# Altium PCB PCB_Testplatine - GND mit Tracks.PcbDoc (part 4 of 4)
Units mm, origin at the board's own origin, x right, y up, seen from the top; angles counter-clockwise.
Board outline 124.77 x 137.35 mm, 2 copper layers (Top Layer, Bottom Layer); 214 components, 181 nets, 1100 pads, 464 vias.
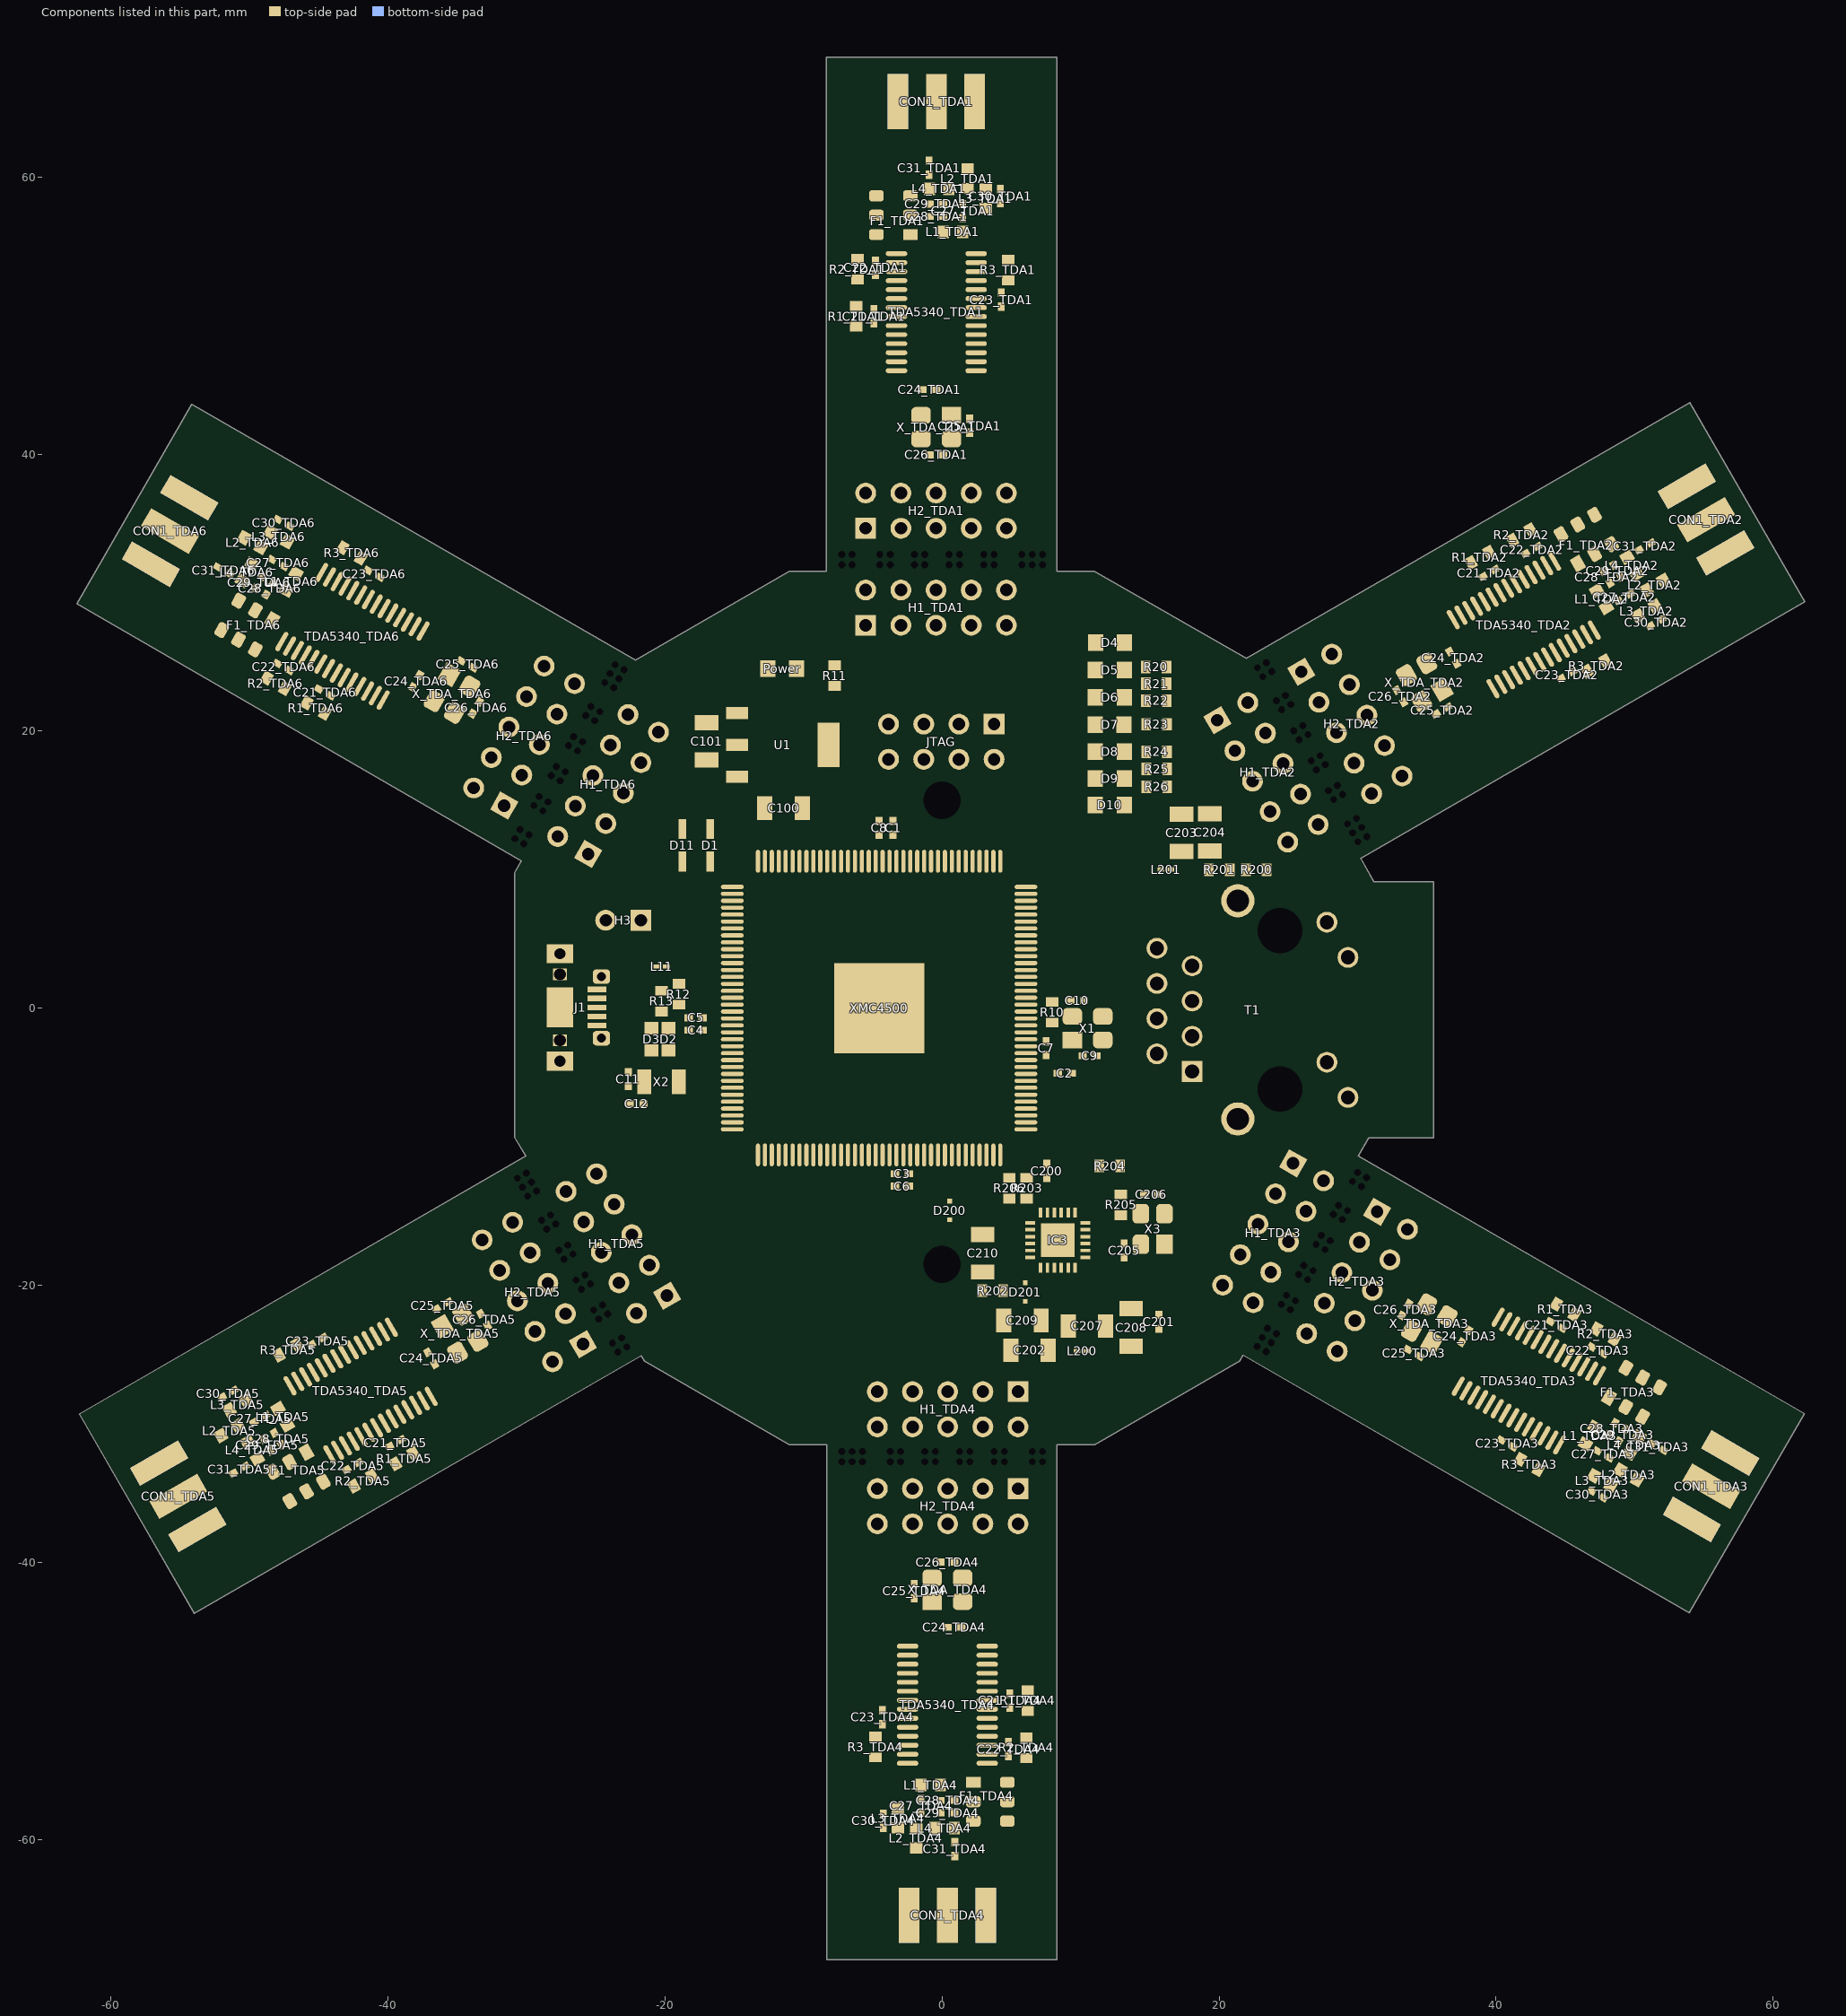
[diagram p4: the components of this part, seen from the top]

## Polygon pours and split planes (outlines as drawn) (continued)
GND on Bottom Layer "Bottom Layer- GND" (solid, pour order 43): -35.803,14.379 -28.053,27.803 -54.034,42.803 -61.784,29.379
"VDD (3,3V)" on Bottom Layer "VDD_(3,3V)_L02_P056" (solid, pour order 56): -19.16,13.25 -1.71,13.25 -1.71,31.29 -10.99,31.29 -19.16,26.56
GND on Bottom Layer "GND_L02_P064" (solid, pour order 64): -21.72,25.11 -19.16,26.56 -19.16,13.25 -1.71,13.25 -1.71,31.29 10.97,31.3 21.72,25.11 31.08,8.91 35.27,8.91 35.27,-9.16 30.67,-9.16 21.35,-25.32 10.96,-31.31 -10.97,-31.3 -21.35,-25.31 -30.62,-9.26 -30.63,9.69

## Other copper
Top Layer:
  text "TOP" at 10.72,-30.9 h1.52 r30
Bottom Layer:
  text "BOT" at 14.24,-28.87 h1.52 r30

## Silkscreen, mask and mechanical layers (free items; w line width, h text height)
Top Overlay:
  text "TDA1" at 6.78,39.14 h1.52 r90
  text "TDA6" at -29.369,27.523 h1.52 r150
  text "TDA2" at 35.98,15.877 h1.52 r30
  text "TDA5" at -35.979,-15.858 h1.52 r210
  text "v1.0" at -19.85,-25.4 h1.52 r330
  text "TDA3" at 29.149,-27.603 h1.52 r330
  text "TDA4" at -6.82,-39.19 h1.52 r270
Mechanical 4:
  circle w0.2: c0,15 r1.5
  circle w0.2: c0,-18.5 r1.5
  lines w0.2: -30.728,9.701 -21.789,25.183 -11,31.4 11,31.4 21.789,25.183 31.127,9.01 35.38,9.01 35.38,-9.266 30.727,-9.266 21.423,-25.38 ; -30.727,9.7 -30.727,-9.266 -21.423,-25.38 -11,-31.4 11,-31.4 21.423,-25.38 ; -27.26,-4.75 -27.26,4.75 ; -22.5,-13 -20.75,-11.75 ; -22.5,13 -20.75,11.75 ; -17.11,22.338 -17.11,-22.3 17.14,-22.3 17.14,22.29 ; 0,-24.75 0,-26 ; 0,24.25 0,26 ; 21,-12.25 22.5,-13 ; 21.25,12.25 22.5,13 ; 0,-26 15,-26 30,0 15,26 -15,26 -30,0 -15,-26 0,-26
Mechanical 16:
  drawing of 1870 lines, arcs and shapes, not listed
  text "1" at -104.254,85.611 h1.78
  text "2" at -31.61,85.611 h1.78
  text "3" at 41.542,85.611 h1.78
  text "4" at 114.44,85.611 h1.78
  text "A" at -138.595,62.599 h1.78
  text "A" at 148.425,62.599 h1.78
  text "B" at -138.595,14.542 h1.78
  text "C" at -138.595,-33.972 h1.78
  text "ENGINEER:" at 33.49,-70.98 h1.14
  text "TITLE:" at 71.59,-70.98 h1.14
  text "Christof Pfannenmueller" at 34.38,-73.93 h1.52
  text "PCB DESIGNER:" at 33.49,-78.473 h1.14
  text "D" at -138.595,-81.978 h1.78
  text "D" at 148.425,-81.978 h1.78
  text "DATE:" at 33.49,-86.22 h1.14
  text "PART NO.:" at 71.59,-86.22 h1.14
  text "REV:" at 124.93,-86.22 h1.14
  text "Altium Limited" at 0.47,-88.76 h1.78
  text ".PRINT_DATE" at 34.76,-89.268 h1.78
  text "12a Rodborough Rd" at 0.47,-91.3 h1.78
  text "Frenchs Forest" at 0.47,-93.84 h1.78
  text "FILE NAME:" at 33.49,-93.84 h1.14
  text "DWG NO:" at 71.59,-93.84 h1.14
  text "SCALE:" at 124.93,-93.84 h1.14
  text "NSW 2086" at 0.47,-96.38 h1.78
  text ".PCB_FILE_NAME_NO_PATH" at 34.76,-96.888 h1.78
  text "1" at -104.254,-102.349 h1.78
  text "2" at -31.61,-102.349 h1.78
  text "3" at 41.542,-102.349 h1.78
  text "4" at 114.44,-102.349 h1.78

## Text inside footprints (layer, text, board x,y; h text height)
H1_TDA1: Top Overlay "2" at -8.06,29.672 h1.27; Top Overlay "1" at -7.552,27.132 h1.27; Top Overlay "9" at 6.164,27.132 h1.27; Top Overlay "10" at 6.164,29.672 h1.27
H1_TDA2: Top Overlay "10" at 27.472,11.676 h1.27 r300; Top Overlay "9" at 25.272,10.406 h1.27 r300; Top Overlay "1" at 19.25,22.8 h1.27 r300; Top Overlay "2" at 20.7,24.1 h1.27 r300
H1_TDA3: Top Overlay "10" at 21.258,-22.336 h1.27 r240; Top Overlay "9" at 19.058,-21.066 h1.27 r240; Top Overlay "1" at 25.916,-9.187 h1.27 r240; Top Overlay "2" at 28.37,-10.017 h1.27 r240
H1_TDA4: Top Overlay "10" at -6.204,-29.722 h1.27 r180; Top Overlay "9" at -6.204,-27.182 h1.27 r180; Top Overlay "1" at 7.512,-27.182 h1.27 r180; Top Overlay "2" at 8.02,-29.722 h1.27 r180
H1_TDA5: Top Overlay "10" at -27.472,-11.657 h1.27 r120; Top Overlay "9" at -25.272,-10.387 h1.27 r120; Top Overlay "1" at -18.414,-22.266 h1.27 r120; Top Overlay "2" at -20.36,-23.976 h1.27 r120
H1_TDA6: Top Overlay "10" at -21.478,22.256 h1.27 r60; Top Overlay "9" at -19.278,20.986 h1.27 r60; Top Overlay "1" at -26.136,9.107 h1.27 r60; Top Overlay "2" at -28.59,9.937 h1.27 r60
H2_TDA1: Top Overlay "2" at -8.06,36.672 h1.27; Top Overlay "1" at -7.552,34.132 h1.27; Top Overlay "9" at 6.164,34.132 h1.27; Top Overlay "10" at 6.164,36.672 h1.27
H2_TDA2: Top Overlay "10" at 33.534,15.176 h1.27 r300; Top Overlay "9" at 31.335,13.906 h1.27 r300; Top Overlay "1" at 24.477,25.785 h1.27 r300; Top Overlay "2" at 26.422,27.495 h1.27 r300
H2_TDA3: Top Overlay "10" at 27.32,-25.836 h1.27 r240; Top Overlay "9" at 25.12,-24.566 h1.27 r240; Top Overlay "1" at 31.978,-12.687 h1.27 r240; Top Overlay "2" at 34.432,-13.517 h1.27 r240
H2_TDA4: Top Overlay "10" at -6.204,-36.722 h1.27 r180; Top Overlay "9" at -6.204,-34.182 h1.27 r180; Top Overlay "1" at 7.512,-34.182 h1.27 r180; Top Overlay "2" at 8.02,-36.722 h1.27 r180
H2_TDA5: Top Overlay "10" at -33.534,-15.157 h1.27 r120; Top Overlay "9" at -31.334,-13.887 h1.27 r120; Top Overlay "1" at -24.476,-25.766 h1.27 r120; Top Overlay "2" at -26.422,-27.476 h1.27 r120
H2_TDA6: Top Overlay "10" at -27.54,25.756 h1.27 r60; Top Overlay "9" at -25.34,24.486 h1.27 r60; Top Overlay "1" at -32.198,12.607 h1.27 r60; Top Overlay "2" at -34.652,13.437 h1.27 r60
JTAG: Top Overlay "8" at -5.394,18.468 h1.27 r180; Top Overlay "7" at -5.394,21.008 h1.27 r180; Top Overlay "1" at 5.782,21.008 h1.27 r180; Top Overlay "2" at 6.29,18.468 h1.27 r180
T1: Top Overlay "1" at 19.1,-4.525 h0.5 r270; Top Overlay "2" at 16.5,-3.225 h0.5 r270; Top Overlay "3" at 19,-1.825 h0.5 r270; Top Overlay "4" at 16.5,-0.625 h0.5 r270; Top Overlay "5" at 19,0.575 h0.5 r270; Top Overlay "6" at 16.5,1.875 h0.5 r270; Top Overlay "7" at 19,2.975 h0.5 r270; Top Overlay "8" at 16.5,4.375 h0.5 r270; Top Overlay "9" at 30.3,-6.325 h0.5 r270; Top Overlay "10" at 28.7,-3.625 h0.5 r270; Top Overlay "11" at 30.3,3.875 h0.5 r270; Top Overlay "12" at 28.7,6.475 h0.5 r270